# Altium PCB LED主控.pcbdoc (part 1 of 2)
Units mil, origin at the board's own origin, x right, y up, seen from the top; angles counter-clockwise.
Board outline 4187.79 x 2551 mil, 2 copper layers (Top Layer, Bottom Layer); 58 components, 35 nets, 197 pads, 174 vias.
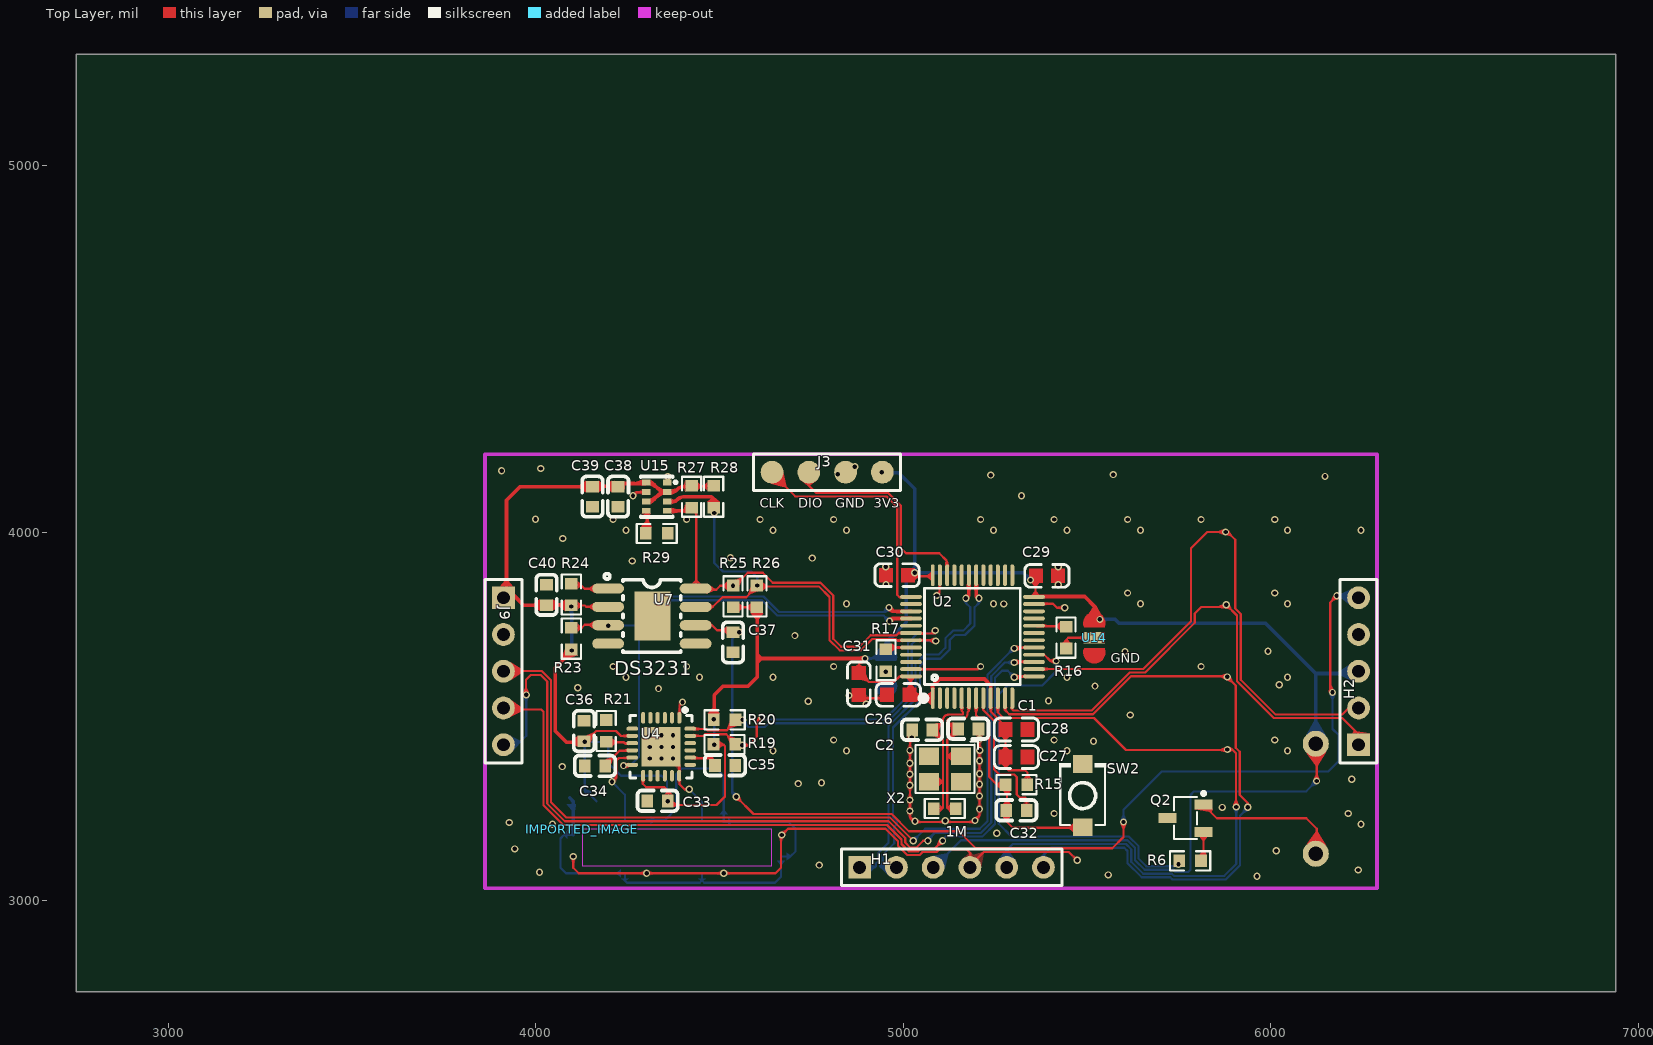
[diagram p0: Top Layer view]
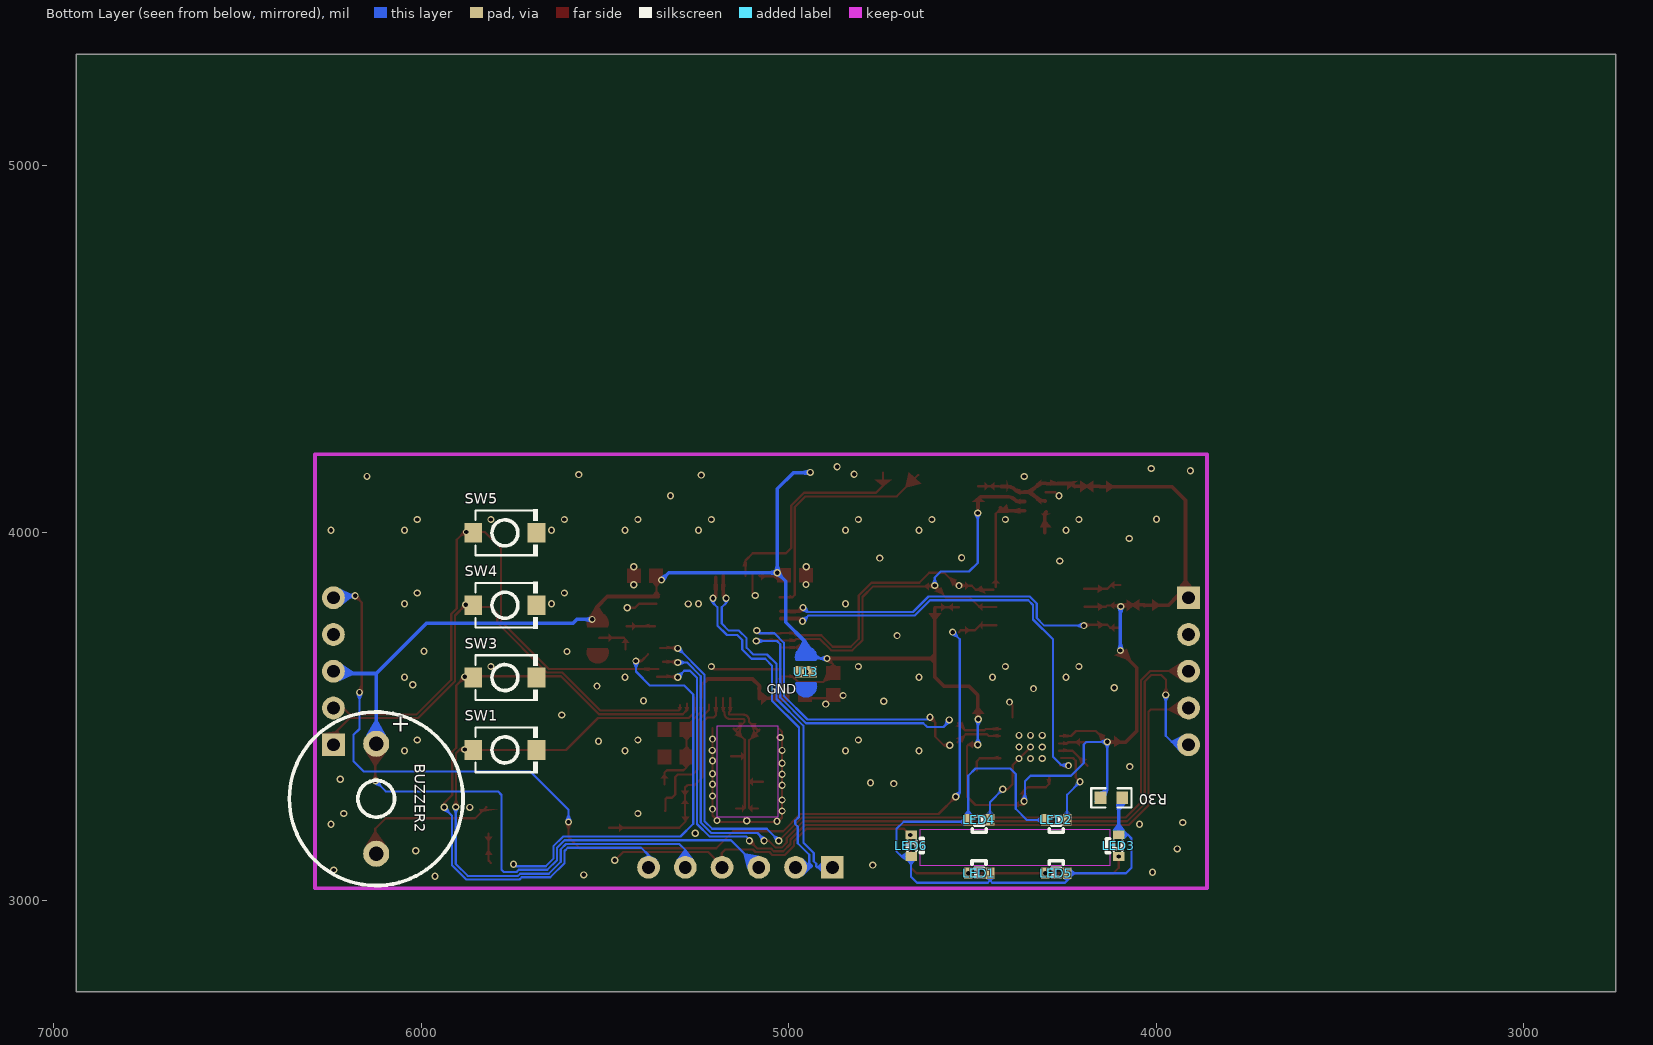
[diagram p1: Bottom Layer view, seen from below]

## Layer stack, top to bottom
Top Layer: signal copper (thickness not stored)
Dielectric: dielectric 12.6, FR-4, Dk 4.8
Bottom Layer: signal copper (thickness not stored)

## Board outline
6937.79,2750 2750,2750 2750,5301 6937.79,5301

## Components (designator, comment, footprint, x,y, rotation, side; value= is the part's Value field where it differs from the comment)
1M "R5" R0603 5112.73,3249.24 r180 top
BUZZER2 "TMB12A05" BUZ-TH_BD12.0-P7.60-D0.6-FD 6122.12,3275.75 r270 bottom
C1 "20pF" C0603 5176.86,3466.23 r0 top
C2 "20pF" C0603 5051.35,3463.36 r0 top
C26 "0.1uF" "C  0603" 4986.25,3558.55 r0 top
C27 "1uF" "C  0603" 5307.73,3389.24 r180 top
C28 "0.1uF" "C  0603" 5307.73,3464.24 r180 top
C29 "0.1uF" "C  0603" 5390.75,3882.26 r0 top
C30 "0.1uF" "C  0603" 4982.73,3884.24 r0 top
C31 "0.1uF" "C  0603" 4878.71,3587.97 r90 top
C32 "100nf" C0603 5307.73,3244.24 r0 top
C33 "10nF" C0603 4331.17,3270.32 r180 top
C34 "100nF" C0603 4161.17,3365.32 r0 top
C35 "2.2nF" C0603 4514.93,3366.91 r0 top
C36 "100nF" C0603 4131.17,3460.32 r90 top
C37 "1u" C0603 4536.67,3701.51 r90 top
C38 "100nF" C0603 4223.89,4097.54 r270 top
C39 "4.7u" C0603 4153.89,4097.54 r270 top
C40 "1u" C0603 4028.95,3830.29 r270 top
H1 "HDR-F-2.54_1x6" HDR-F-2.54_1X6 5081.11,3089.24 r0 top
H2 "HDR-F-2.54_1x5" HDR-F-2.54_1X5 6238.58,3622.72 r90 top
IMPORTED_IMAGE "IMPORTED_IMAGE" IMPORTED_IMAGE 4126.81,3193.27 r0 top
J3 "ST-Link下载口" J-LINK下载口 4827.73,4164.24 r180 top
J9 "HDR-M-2.54_1x5" HDR-M-2.54_1X5 3911.81,3622.72 r270 top
LED1 "XL-1606UGC" LED-SMD_L1.7-W1.1-R-RD_GREEN 4481.81,3073.27 r180 bottom
LED2 "XL-1606UGC" LED-SMD_L1.7-W1.1-R-RD_GREEN 4271.81,3218.27 r0 bottom
LED3 "XL-1606UGC" LED-SMD_L1.7-W1.1-R-RD_GREEN 4101.81,3148.27 r90 bottom
LED4 "XL-1606UGC" LED-SMD_L1.7-W1.1-R-RD_GREEN 4481.81,3218.27 r0 bottom
LED5 "XL-1606UGC" LED-SMD_L1.7-W1.1-R-RD_GREEN 4271.81,3073.27 r180 bottom
LED6 "XL-1606UGC" LED-SMD_L1.7-W1.1-R-RD_GREEN 4666.81,3148.27 r270 bottom
Q2 "2N3906(SOT-23)" SOT-23-3_L2.9-W1.6-P1.90-LS2.8-TR-CW 5767.67,3223.21 r0 top
R6 "1kΩ" R0603 5780.24,3106.86 r0 top
R15 "10k" R0603 5307.73,3314.24 r0 top
R16 "10k" R0603 5442.73,3714.24 r90 top
R17 "10k" R0603 4952.66,3652.57 r90 top
R19 "4.7k" R0603 4513.24,3423.42 r180 top
R20 "4.7k" R0603 4513.74,3490.43 r180 top
R21 "10k" R0603 4191.17,3460.32 r270 top
R23 "4k7" R0603 4096.67,3711.51 r270 top
R24 "4k7" R0603 4096.67,3831.51 r270 top
R25 "4.7k" R0603 4536.67,3826.51 r270 top
R26 "4.7k" R0603 4601.67,3826.51 r270 top
R27 "4.7k" R0603 4483.89,4097.54 r270 top
R28 "4.7k" R0603 4423.89,4097.54 r270 top
R29 "10K" R0603 4328.89,3997.54 r0 top
R30 "Res_0603" R0603 4121.81,3278.27 r0 bottom
SW1 "SKRKAEE020" SW-SMD_L3.9-W3.0-P4.45 5771.92,3408.69 r180 bottom
SW2 "SKRKAEE020" SW-SMD_L3.9-W3.0-P4.45 5487.73,3284.24 r90 top
SW3 "SKRKAEE020" SW-SMD_L3.9-W3.0-P4.45 5771.92,3605.54 r180 bottom
SW4 "SKRKAEE020" SW-SMD_L3.9-W3.0-P4.45 5771.92,3802.39 r180 bottom
SW5 "SKRKAEE020" SW-SMD_L3.9-W3.0-P4.45 5771.92,3999.24 r180 bottom
U2 "STM32F103C8T6" LQFP-48_L7.0-W7.0-P0.50-LS9.0-BL 5188.12,3716.94 r0 top
U4 "MPU-6050" MPU-6050 4341.17,3417.3 r180 top
U7 "DS3231MZ+TRL" DS3231MZ+TRL 4315.73,3772.85 r270 top
U13 "选择焊盘" 选择焊盘 4952.77,3621.59 r90 bottom
U14 "选择焊盘" 选择焊盘 5519.42,3713.87 r90 top
U15 "BMP280" WLGA-8_L2.5-W2.0-P0.65-TR_DPS422 4328.89,4097.54 r0 top
X2 "8MHz" OSC-SMD_4P-L3.2-W2.5-BL 5113.3,3356.77 r180 top

## Footprints (in the part's own frame and the unit in brackets; to place one, negate y for a bottom-side part, rotate by r counter-clockwise, add the part's x,y. Pads: shape width x height; smd on the part's side, far side on the other; paste and mask are expansions set on the pad)
BUZ-TH_BD12.0-P7.60-D0.6-FD [mm]
  round 1.8 hole 1 paste+0 mask+0.051: 1(-3.8,0) 2(3.8,0)
  silkscreen extent -6,-6 6,6
C0603 [mm]
  rect 0.8x0.9 smd paste+0 mask+0.051: 1(-0.7,0) 2(0.7,0)
  silkscreen extent -1.41,-0.71 1.39,0.72
"C  0603" [mil]
  Top Layer region: -48.62,19.29 -12.01,19.29 -12.01,-19.29 -48.62,-19.29
  Top Layer region: 12.01,19.29 48.62,19.29 48.62,-19.29 12.01,-19.29
  silkscreen extent -60,-31 60,31
DS3231MZ+TRL [mm]
  oval 0.7x2.2 smd paste+0 mask+0.05: 1(-1.905,-3.023) 2(-0.635,-3.023) 3(0.635,-3.023) 4(1.905,-3.023) 5(1.905,3.023) 6(0.635,3.023) 7(-0.635,3.023) 8(-1.905,3.023)
  rect 3.4x2.5 smd paste+0 mask+0.05: 9(0,0.051)
  silkscreen extent -2.93,-3.29 2.5,2
HDR-F-2.54_1X5 [mil]
  rect 62x62 hole 35 paste+0 mask+2: 1(-200,0)
  round 62 hole 35 paste+0 mask+2: 2(-100,0) 3(0,0) 4(100,0) 5(200,0)
  silkscreen extent -250,-50 250,50
HDR-F-2.54_1X6 [mil]
  rect 62x62 hole 35 paste+0 mask+2: 1(-200,0)
  round 62 hole 35 paste+0 mask+2: 2(-100,0) 3(0,0) 4(100,0) 5(200,0) 6(300,0)
  silkscreen extent -250,-50 350,50
HDR-M-2.54_1X5 [mil]
  rect 62x62 hole 35 paste+0 mask+2: 1(-200,0)
  round 62 hole 35 paste+0 mask+2: 2(-100,0) 3(0,0) 4(100,0) 5(200,0)
  silkscreen extent -250,-50 250,50
IMPORTED_IMAGE [mil]
J-LINK下载口 [mil]
  round 62 smd paste+0 mask+2: 1(-115,0) 2(-15,0) 3(85,0) 4(185,0)
  silkscreen extent -165,-50 235,50
LED-SMD_L1.7-W1.1-R-RD_GREEN [mm]
  rect 0.6x0.8 smd mask+0.051: 1(0.75,0) 2(-0.75,0)
  silkscreen extent -0.49,-0.25 0.48,0.85
LQFP-48_L7.0-W7.0-P0.50-LS9.0-BL [mm]
  oval 0.27x1.5 smd paste+0 mask+0.05: 1(-2.75,-4.25) 2(-2.25,-4.25) 3(-1.75,-4.25) 4(-1.25,-4.25) 5(-0.75,-4.25) 6(-0.25,-4.25) 7(0.25,-4.25) 8(0.75,-4.25) 9(1.25,-4.25) 10(1.75,-4.25) 11(2.25,-4.25) 12(2.75,-4.25) 25(2.75,4.25) 26(2.25,4.25) 27(1.75,4.25) 28(1.25,4.25) 29(0.75,4.25) 30(0.25,4.25) 31(-0.25,4.25) 32(-0.75,4.25) 33(-1.25,4.25) 34(-1.75,4.25) 35(-2.25,4.25) 36(-2.75,4.25)
  oval 1.5x0.27 smd paste+0 mask+0.05: 13(4.25,-2.75) 14(4.25,-2.25) 15(4.25,-1.75) 16(4.25,-1.25) 17(4.25,-0.75) 18(4.25,-0.25) 19(4.25,0.25) 20(4.25,0.75) 21(4.25,1.25) 22(4.25,1.75) 23(4.25,2.25) 24(4.25,2.75) 37(-4.25,2.75) 38(-4.25,2.25) 39(-4.25,1.75) 40(-4.25,1.25) 41(-4.25,0.75) 42(-4.25,0.25) 43(-4.25,-0.25) 44(-4.25,-0.75) 45(-4.25,-1.25) 46(-4.25,-1.75) 47(-4.25,-2.25) 48(-4.25,-2.75)
  silkscreen extent -3.59,-4.46 3.3,3.34
MPU-6050 [mm]
  oval 0.28x0.8 smd paste-100 mask+0.05: 1(-1.25,-2) 2(-0.75,-2) 3(-0.25,-2) 4(0.25,-2) 5(0.75,-2) 6(1.25,-2) 13(1.25,2) 14(0.75,2) 15(0.25,2) 16(-0.25,2) 17(-0.75,2) 18(-1.242,2)
  oval 0.8x0.28 smd paste-100 mask+0.05: 7(2,-1.25) 8(2,-0.75) 9(2,-0.25) 10(2,0.25) 11(2,0.75) 12(2,1.25) 19(-2,1.25) 20(-2,0.75) 21(-2,0.25) 22(-2,-0.25) 23(-2,-0.75) 24(-2,-1.25)
  rect 2.7x2.7 smd paste-100 mask+0.05: 25(0.012,0)
  silkscreen extent -2.14,-2.79 2.16,2.15
OSC-SMD_4P-L3.2-W2.5-BL [mm]
  rect 1.4x1.2 smd paste+0 mask+0.051: 1(-1.1,-0.875) 2(1.1,-0.875) 3(1.1,0.875) 4(-1.1,0.875)
  silkscreen extent -2.29,-1.9 2.03,1.65
R0603 [mil]
  rect 31.75x34.02 smd paste-3937.01 mask+2: 1(-29.66,0) 2(29.66,0)
  silkscreen extent -55,-26 55,26
SOT-23-3_L2.9-W1.6-P1.90-LS2.8-TR-CW [mm]
  rect 1.25x0.7 smd paste+0 mask+0.051: 1(1.25,0.95) 2(1.25,-0.95) 3(-1.25,0)
  silkscreen extent -0.8,-1.45 1.37,1.82
SW-SMD_L3.9-W3.0-P4.45 [mm]
  rect 1.23x1.36 smd paste+0 mask+0.051: 1(-2.185,0) 2(2.185,0)
  silkscreen extent -2.03,-1.62 2.25,1.62
WLGA-8_L2.5-W2.0-P0.65-TR_DPS422 [mm]
  rect 0.6x0.4 smd paste+0 mask+0.051: 1(0.725,0.975) 2(0.725,0.325) 3(0.725,-0.325) 4(0.725,-0.975) 5(-0.725,-0.975) 6(-0.725,-0.325) 7(-0.725,0.325) 8(-0.725,0.975)
  silkscreen extent -1.1,-1.4 1.4,1.4
选择焊盘 [mm]
  rect 0.8x1.5 smd paste+0 mask+0.051: 2(0,0)
  Top Layer region: -1.035,-0.762 -1.111,-0.756 -1.186,-0.743 -1.259,-0.722 -1.329,-0.695 -1.397,-0.66 -1.461,-0.619 -1.52,-0.571 -1.575,-0.518 -1.623,-0.46 -1.666,-0.397 -1.703,-0.331 -1.732,-0.261 -1.754,-0.188 -1.769,-0.114 -1.777,-0.038 -1.777,0.038 -1.769,0.114 -1.754,0.188 -1.732,0.261 -1.703,0.331 -1.666,0.397 -1.623,0.46 -1.575,0.518 -1.52,0.571 -1.461,0.619 -1.397,0.66 -1.329,0.695 -1.259,0.722 -1.186,0.743 -1.111,0.756 -1.035,0.762 -0.959,0.76 -0.884,0.75 -0.81,0.734 -0.738,0.709 -0.738,-0.709 -0.81,-0.734 -0.884,-0.75 -0.959,-0.76
  Top Layer region: 1.035,0.762 1.111,0.756 1.186,0.743 1.259,0.722 1.329,0.695 1.397,0.66 1.461,0.619 1.52,0.571 1.575,0.518 1.623,0.46 1.666,0.397 1.703,0.331 1.732,0.261 1.754,0.188 1.769,0.114 1.777,0.038 1.777,-0.038 1.769,-0.114 1.754,-0.188 1.732,-0.261 1.703,-0.331 1.666,-0.397 1.623,-0.46 1.575,-0.518 1.52,-0.571 1.461,-0.619 1.397,-0.66 1.329,-0.695 1.259,-0.722 1.186,-0.743 1.111,-0.756 1.035,-0.762 0.959,-0.76 0.884,-0.75 0.81,-0.734 0.738,-0.709 0.738,0.709 0.81,0.734 0.884,0.75 0.959,0.76

## Via types
v1: diameter 19.68, hole 11.81, Top Layer to Bottom Layer, 173 vias
v2: diameter 24.02, hole 12.01, Top Layer to Bottom Layer, 1 vias

## Nets (pads, with @x,y where several pads share a name; then routed paths per layer and width w, separated by ;. In a path a pad name is that pad's centre, name@x,y a point inside that pad or via, vN(x,y) a via of type N, cw(c..) or ccw(c..) an arc to the next point about the centre after c; other vN are vias at no path point)
3V3: BUZZER2.1 C33.1 C36.1 C38.1 C39.1 C40.2 H1.3 H2.3 J3.1 J9.1 R15.2 R19.2 R20.2 R23.2 R24.2 R25.2 R26.2 R27.1 R28.1 R30.2 U2.1 U2.9 U2.24 U2.36 U2.48 U4.8 U4.13 U7.2 U15.2 U15.6 U15.8 | length 8196.4
  Top Layer w6: R24.2@4096.67,3801.85 4132.94,3801.85 4136.75,3798.05 4194.51,3798.05 U7.2@4195.25,3797.31 ; C36.1@4133.93,3429.24 4164.61,3459.92 4218,3459.92 4231.66,3446.27 U4.8@4261.34,3446.27 ; U4.13@4291.13,3336.99 4291.13,3316.28 4300.22,3307.19 4350.13,3307.19 4360.67,3296.64 4360.67,3268.8 C33.1@4358.71,3266.84 ; C33.1@4359.52,3258.75 4491.7,3258.75 4514.88,3281.93 4514.88,3418.99 4510.34,3423.53 4483.93,3423.53 R19.2@4483.6,3423.85 ; R28.1@4426.47,4125.27 4427.39,4126.19 R27.1@4484.06,4126.19 ; R25.2@4536.26,3796.82 R26.2@4602.49,3796.82 ; 4878.98,3621.3 4878.98,3640.92 v1(4895.66,3657.6) ; 4880.86,3618.49 4905.58,3593.77 4974.71,3593.77 4989.59,3608.65 5021.48,3608.65 U2.48@5022.02,3609.2 ; 5006.52,3881.06 5078.09,3881.06 U2.36@5080.11,3883.09 ; 5019.76,3559.56 5019.76,3607.2 U2.48@5020.31,3607.75 ; U2.9@5237.49,3545.15 5237.49,3513.22 5277.53,3473.17 5277.53,3463.53 ; 5277.17,3389.39 5277.53,3389.76 5277.53,3393.44 ; 5277.53,3461.69 5277.53,3393.44 ; R15.2@5338.06,3315.44 5338.06,3346.16 5330.84,3353.38 5285.95,3353.38 5278.82,3360.51 5277.53,3393.44 ; U2.24@5354.73,3825.34 5359.52,3830.13 5359.52,3876.3 ; BUZZER2.1@6123.88,3424.88 6124.7,3424.05 6124.7,3324.71 6124.34,3324.34 v1(6124.34,3324.03)
  Top Layer w10: J9.1@3914.4,3828.7 3940.25,3828.7 3966.43,3802.52 4030.16,3802.52 C40.2@4031.87,3800.81 ; J9.1@3916.93,3838.99 3920.31,3842.37 3920.31,4088.18 3956.92,4124.79 C39.1@4152.94,4124.79 ; C40.2@4033.07,3803.78 4093.07,3802.76 R24.2@4095.65,3800.19 ; v1(4097.27,3679.16) 4097.27,3676.63 4052.85,3632.21 4052.85,3459.82 4082.69,3429.98 C36.1@4133.19,3429.98 ; C39.1@4153.21,4125.52 cw(c4154.22,4124.51) 4154.22,4125.94 C38.1@4216.56,4125.94 ; C38.1@4221.7,4125.1 cw(c4241.74,4105.06) 4241.74,4133.4 4266.77,4133.4 ccw(c4267.03,4133.65) 4267.03,4133.3 U15.8@4297.03,4133.3 ; U15.8@4301.26,4134.39 4302.04,4134.39 cw(c4302.04,4096.37) 4328.93,4123.26 4330.56,4121.62 ccw(c4358.06,4149.12) U15.2@4358.06,4110.23 ; U15.6@4302.43,4086.09 ccw(c4302.43,4121) 4327.12,4096.31 4328.58,4097.76 cw(c4358.17,4068.17) U15.2@4358.17,4110.02 ; U15.2@4354.45,4109.56 4365.64,4109.56 ccw(c4365.64,4136.82) 4384.91,4117.54 cw(c4403.43,4099.03) 4403.43,4125.21 R28.1@4421.68,4125.21 ; R20.2@4485.13,3493.78 4485.13,3557.8 4509.14,3581.8 4577.3,3581.8 4602.41,3606.92 4602.41,3646.23 ; R26.2@4602.41,3794.01 4602.41,3668.28 ; v1(4895.66,3657.6) 4613.1,3657.6 ; v1(4941.03,4163.72) 4941.86,4163.72 J3.1@4942.27,4163.31 ; 5015.34,3554.55 5020.31,3549.58 U2.1@5077.15,3549.58 ; U2.1@5079.55,3547.83 5079.55,3583.32 5097.96,3601.74 5220.65,3601.74 5238.04,3584.35 U2.9@5238.04,3550.68 ; U2.24@5355.37,3825.96 5493.21,3825.96 5521.35,3797.81 5521.35,3761.8 5521.77,3761.38 ; 5516.39,3756 5517.63,3757.24 ; 4602.41,3646.23 4613.1,3656.91 4613.1,3657.6 ; 4602.41,3646.23 4602.41,3658.17 ; 4602.41,3658.17 4602.99,3657.6 4613.1,3657.6 ; 4602.41,3658.17 4602.41,3668.28 ; 4602.41,3668.28 4613.1,3657.6
  Bottom Layer w6: R30.2@4165.15,3268.8 4133.14,3300.81 v1(4133.14,3430.51) 4189.57,3430.51 4196.81,3423.27 4196.81,3373.27 4231.81,3338.27 4341.81,3338.27 4356.81,3323.27 4356.81,3271.23 v1(4359.24,3268.8) ; v1(4483.97,3491.94) 4485.2,3490.72 v1(4485.2,3422.77) ; v1(4895.66,3657.6) 4943.58,3657.6 4952.57,3666.6 ; H1.3@5082.28,3088.07 5156.92,3162.71 5609.62,3162.71 5630.12,3142.22 5630.12,3108.76 5656.53,3082.35 5734.29,3082.35 5740.29,3076.35 5775.24,3076.35 5781.24,3082.35 5781.24,3286.11 5791.03,3295.9 6096.2,3295.9 v1(6124.34,3324.03)
  Bottom Layer w10: v1(4096.04,3799.11) 4097.27,3797.89 v1(4097.27,3679.16) ; v1(4941.03,4163.72) 4941.86,4162.9 4986.98,4162.9 5030.74,4119.13 v1(5030.74,3890.97) ; 4956.83,3674.96 4956.83,3705.13 5007.61,3755.9 5007.61,3867.84 v1(5030.74,3890.97) ; v1(5345.87,3870.94) 5325.84,3890.97 v1(5030.74,3890.97) ; v1(5534.65,3763.83) 5576.42,3763.83 5586.81,3753.43 5985.29,3753.43 6122.12,3616.6 ; BUZZER2.1@6122.12,3425.66 6122.12,3616.6 ; H2.3@6230.62,3626.68 6220.55,3616.6 6122.12,3616.6
$1N131: R29.1 U15.5 | length 58.7
  Top Layer w10: U15.5@4298.97,4056.97 cw(c4288.7,4046.7) 4303.23,4046.7 R29.1@4303.23,3999.45
$1N255: R24.1 U7.1 | length 102.7
  Top Layer w6: R24.1@4097.75,3857.66 4122.21,3857.66 4132.52,3847.35 U7.1@4196.17,3847.35
$1N454: C34.2 U4.10 | length 95.1
  Top Layer w6: C34.2@4186.56,3365.4 4227.77,3406.61 U4.10@4264.56,3406.61
$1N460: C35.1 U4.20 | length 92.9
  Top Layer w6: U4.20@4423.33,3385.82 4479.84,3385.82 4488.27,3377.39 C35.1@4488.27,3352.89
$1N815: BUZZER2.2 Q2.1 | length 388.7
  Top Layer w6: Q2.1@5822.91,3252.82 5852.99,3222.74 6096.38,3222.74 6124.81,3194.32 6124.81,3138.02 BUZZER2.2@6120.39,3133.61
$1N1026: R21.2 U4.9 | length 76.2
  Top Layer w6: R21.2@4188.95,3429.42 4239.54,3429.42 4242.67,3426.29 U4.9@4263.83,3426.29
$1N1067: Q2.2 R6.2 | length 81.8
  Top Layer w6: R6.2@5810.49,3101.32 5816.84,3107.67 Q2.2@5816.84,3180.52
$1N3910: R16.1 U14.2 | length 100.6
  Top Layer w6: R16.1@5443.65,3682.46 5443.65,3708.71 5448.68,3713.73 5514.66,3713.73 U14.2@5515.52,3712.88
$1N3944: R17.1 U13.2
  other v2: 4952.36,3621.07
$1N5126: LED1.1 LED2.1 LED3.1 LED4.1 LED5.1 LED6.1 R30.1 | length 1721.1
  Bottom Layer w6: LED3.1@4101.81,3177.81 4076.81,3177.81 4066.81,3167.81 4066.81,3088.27 4081.81,3073.27 LED5.1@4242.27,3073.27 4242.27,3053.27 4248.27,3047.27 4445.81,3047.27 4451.81,3053.27 4451.81,3072.81 LED1.1@4452.27,3073.27 4452.27,3052.81 4458.1,3046.98 4650.52,3046.98 4666.81,3063.27 LED6.1@4666.81,3118.74 4692.27,3118.74 4706.81,3133.27 4706.81,3193.27 4686.81,3213.27 LED4.1@4511.34,3213.27 ; LED2.1@4301.34,3218.27 4351.81,3218.27 4381.81,3248.27 4381.81,3343.27 4396.81,3358.27 4491.81,3358.27 4511.34,3338.74 LED4.1@4511.34,3218.27
  Bottom Layer w10: R30.1@4092.15,3278.27 4101.81,3268.61 LED3.1@4101.81,3177.81
BAT: C37.2 H2.5 U7.6 | length 2936.8
  Top Layer w6: U7.6@4434.73,3747.85 4479.11,3747.85 4492.73,3734.24 4531.51,3734.24 C37.2@4536.67,3729.07 ; v1(4545.31,3281.33) 4592.23,3234.41 4968.13,3234.41 5015.02,3187.52 5150.52,3187.52 5196.88,3141.16 5568.6,3141.16 5598.95,3171.52 v1(5598.95,3212.63) ; v1(6167.8,3565.2) 6161.7,3571.3 6161.7,3810.02 v1(6179.58,3827.9)
  Bottom Layer w6: v1(4545.31,3281.33) 4546.56,3281.33 4534.14,3293.75 4534.14,3709.64 v1(4553.76,3729.26) ; v1(5598.95,3212.63) 5598.95,3245.68 5703.09,3349.82 6156.24,3349.82 6183.98,3377.55 6183.98,3449.58 6167.8,3465.76 v1(6167.8,3565.2) ; v1(6179.58,3827.9) 6237.31,3827.9 H2.5@6238.59,3829.18
BOOT0: R17.2 U2.44 | length 69.7
  Top Layer w6: R17.2@4954.44,3679.32 4962.54,3687.42 U2.44@5020.8,3687.41
BOOT1: R16.2 U2.20 | length 78.3
  Top Layer w6: U2.20@5363.32,3745.13 5440.22,3745.13 R16.2@5441.2,3744.15
BUZZ: R6.1 U2.16 | length 1161.2
  Top Layer w6: U2.16@5382.26,3668.89 5400.47,3650.67 v1(5415.52,3650.67)
  Bottom Layer w6: v1(5415.52,3650.67) 5415.52,3622.06 5377.1,3583.64 5283.55,3583.64 5259.29,3559.38 5259.29,3207.86 5294.12,3173.04 5613.46,3173.04 5640.14,3146.36 5640.14,3112.91 5660.7,3092.35 5741.48,3092.35 v1@5747.48,3098.35
  other v1: 5748.68,3097.73
DS3231_INT: R23.1 U2.39 U7.3 | length 1011.5
  Top Layer w6: R23.1@4096.67,3741.17 4124.66,3741.17 4132.73,3749.24 4195.34,3749.24 U7.3@4196.73,3747.85
  Top Layer w10: v1(4961.09,3796.25) 4971.76,3785.58 U2.39@5021.43,3785.58
  Bottom Layer w6: v1(4196.65,3746.89) 4304.12,3746.89 4324.92,3767.69 4324.92,3806.96 4344.1,3826.14 4619.36,3826.14 4661.4,3784.1 4948.95,3784.1 v1(4961.09,3796.25)
GND: C1.2 C2.1 C32.2 C33.2 C34.1 C35.2 C36.2 C37.1 C38.2 C39.2 C40.1 H1.4 H2.4 J3.2 J9.2 LED1.2 LED2.2 LED3.2 LED4.2 LED5.2 LED6.2 Q2.3 R21.1 R29.2 SW1.2 SW2.2 SW3.2 SW4.2 SW5.2 U2.8 U2.23 U2.35 U2.47 U4.1 U4.11 U4.18 U4.25 U7.5 U15.1 U15.7 X2.2 X2.4 | length 3657.1
  Top Layer w6: v1(4101.81,3118.75) 4101.81,3088.27 4116.81,3073.27 v1(4301.33,3073.27) v1(4511.33,3073.27) 4651.81,3073.27 4666.81,3088.27 4666.81,3175.12 v1(4668.78,3177.08) 4686.06,3194.36 4951.52,3194.36 4984.99,3160.89 4984.99,3148.43 5010.62,3122.8 5044.43,3122.8 5052.3,3130.67 5089.9,3130.67 5097.16,3137.93 5172.16,3137.93 5181.81,3128.27 H1.4@5181.81,3094.58 ; v1(4207.03,3321.85) 4218.96,3333.78 4218.96,3378.93 4226.5,3386.47 U4.11@4258.39,3386.47 ; v1(4264.47,4100.02) 4274.4,4109.96 4300.71,4109.96 U15.7@4301.45,4109.22 ; U4.25@4340.68,3417.3 4390.07,3367.91 U4.18@4390.07,3338.56 ; U4.18@4390.93,3335.73 4390.93,3315.1 4404.26,3301.78 4417.04,3301.78 v1(4417.22,3301.6) ; U4.1@4391.17,3497.14 4391.17,3530.91 v1(4399.02,3538.76) ; 4881.97,3551.8 4884.71,3549.06 4953.44,3549.06 ; U2.47@5020.66,3628.27 5202.8,3628.27 v1(5210.16,3635.63) ; C2.1@5025.85,3466.13 5017.76,3458.03 v1(5017.76,3407.33) v1(5017.76,3372.33) v1(5017.76,3342.33) v1(5017.76,3312.33) v1(5017.76,3272.33) v1(5017.76,3242.33) 5017.76,3224.57 5030.08,3212.25 5188.94,3212.25 5207.13,3230.43 v1(5207.13,3247.69) v1(5207.13,3283.29) v1(5207.13,3315.16) v1(5207.13,3344.14) v1(5207.13,3378.91) v1(5207.13,3438.1) C1.2@5207.13,3467.85 ; v1(5090.72,3828.81) 5098.37,3836.46 U2.35@5098.37,3891.14 ; H1.4@5174.95,3087.71 H1.4@5181.81,3094.58 ; U2.8@5216.96,3532.16 5216.96,3517.49 5246.5,3487.95 5246.5,3355.89 5260.8,3341.59 5302.02,3341.59 5308.43,3335.17 5308.43,3287.1 5317.13,3278.4 5331.99,3278.4 5335.19,3275.2 5335.19,3244.16 C32.2@5335.94,3243.41 ; U2.23@5359.69,3806.46 5406.97,3806.46 5417.82,3795.6 v1(5439.35,3795.6) ; v1(5472.92,3108.44) 5450.22,3131.15 5218.38,3131.15 H1.4@5181.81,3094.58
  Bottom Layer w6: v1@4208,3325.99 4208,3322.82 v1(4207.03,3321.85) 4242.28,3286.6 LED2.2@4242.28,3218.27 ; v1(4417.22,3301.6) 4452.28,3266.53 LED4.2@4452.28,3218.27
  other v1: 5962.28,3065.25 5557.28,3068.58 4010.05,3075.93 6237.81,3081.89 4770.98,3095.33 6014.36,3134.27 3942.83,3139.31 5254.03,3181.78 4045.29,3206.27 6245.29,3206.27 3927.47,3211.14 5031.66,3214.76 5114.01,3215.94 5194.75,3216.43 5410.16,3235.63 6210.16,3235.63 5867.32,3252.32 4714.1,3317.06 4777.07,3319.31 6220.24,3328.63 4071.81,3363.27 4310.2,3385.27 4341.7,3385.27 4373.19,3385.27 4645.29,3406.27 4845.29,3406.27 5445.29,3406.27 6045.29,3406.27 5207.76,3407.33 4310.2,3416.77 4341.7,3416.77 4373.19,3416.77 5517.26,3432.43 4810.16,3435.63 5410.16,3435.63 6010.16,3435.63 5022.76,3442.33 4310.2,3448.27 4341.7,3448.27 4373.19,3448.27 5617.13,3503.88 4899.05,3533.28 4741.02,3541.04 5394.73,3542.67 4851.76,3556.83 4333.91,3575.47 4113.93,3577.88 5521.48,3582.24 6022.56,3585.68 4245.29,3606.27 4445.29,3606.27 4645.29,3606.27 5445.29,3606.27 6045.29,3606.27 4210.16,3635.63 4410.16,3635.63 4810.16,3635.63 5810.16,3635.63 5603.05,3676.36 5992.11,3677.28 4704.91,3719.65 4845.29,3806.27 5245.29,3806.27 5272.82,3806.05 5645.29,3806.27 6045.29,3806.27 5610.16,3835.63 6010.16,3835.63 5421.32,3857.9 4952.86,3858.59 4952.03,3907.16 5421.14,3906.84 4262,3922.8 4751.77,3930.53 4529.39,3931.83 4073.52,3983.8 4245.29,4006.27 4645.29,4006.27 4845.29,4006.27 5245.29,4006.27 5445.29,4006.27 5645.29,4006.27 6045.29,4006.27 6245.29,4006.27 3999.21,4036.2 4210.16,4035.63 4410.16,4035.63 4610.16,4035.63 4810.16,4035.63 5210.16,4035.63 5410.16,4035.63 5610.16,4035.63 5810.16,4035.63 6010.16,4035.63 5321.55,4099.92 4358.78,4152.58 6147.01,4152.93 5237.43,4156.39 5571.14,4157.73 4821.79,4158.78 3906.78,4168.49 4013.56,4174.25 4868.16,4179.06
KEY1: H1.5 SW1.1 U2.10 | length 1782
  Top Layer w6: U2.10@5256.72,3550.37 5256.72,3510.83 5272.04,3495.51 5518.67,3495.51 5605.62,3408.56 5880.28,3408.56 v1(5881.66,3409.95) 5894.81,3409.95 5905.25,3399.51 5905.25,3253.62 v1(5905.62,3253.25)
  Bottom Layer w6: H1.5@5281.09,3091.29 5281.64,3091.84 5281.64,3137.1 5297.24,3152.7 5605.48,3152.7 5620.11,3138.07 5620.11,3104.61 5652.75,3071.97 5730.51,3071.97 5736.51,3065.97 5873.08,3065.97 5905.62,3098.51 v1(5905.62,3253.25)
KEY2: H1.6 SW3.1 U2.11 | length 1859.9
  Top Layer w6: U2.11@5276.51,3534.57 5276.51,3517.1 5288.08,3505.53 5516.19,3505.53 5619.56,3608.9 5879.53,3608.9 v1(5881.04,3607.39) 5904.5,3583.93 5904.5,3414.42 5915.27,3403.66 5915.27,3286.04 5937.3,3264.01 v1(5937.3,3252.57)
  Bottom Layer w6: H1.6@5381.16,3092.39 5381.16,3122.54 5401.31,3142.68 5601.33,3142.68 5610.09,3133.92 5610.09,3100.46 5648.6,3061.95 5726.36,3061.95 5732.36,3055.95 5877.23,3055.95 5915.63,3094.36 5915.63,3229.15 5936.41,3249.93 5936.41,3251.68 v1(5937.3,3252.57)
KEY3: H2.1 SW4.1 U2.12 | length 1346.1
  Top Layer w6: U2.12@5295.42,3531.1 5295.42,3519.57 5299.44,3515.54 5512.04,3515.54 5615.41,3618.92 5657.21,3618.92 5792.63,3754.35 5792.63,3779.89 5810.34,3797.6 5872.56,3797.6 v1(5878.56,3803.6) 5907.77,3774.39 5907.77,3595.6 6008.1,3495.26 6194.51,3495.26 H2.1@6241.95,3447.82
KEY4: H2.2 SW5.1 U2.14 | length 1587.4
  Top Layer w6: U2.14@5353.92,3628.94 5653.06,3628.94 5782.62,3758.5 5782.62,3957.18 5827.1,4001.67 v1(5876.69,4001.67) 5882.15,4001.67 5902.97,3980.84 5902.97,3793.33 5917.78,3778.51 5917.78,3599.73 6012.13,3505.38 6195.09,3505.38 6219.43,3529.72 H2.2@6240.31,3529.72
MAX7219_CLK: J9.5 U2.15 | length 2428.4
  Top Layer w6: v1@3970.74,3562.36 3972.96,3564.58 3972.96,3599.55 3986.06,3612.65 4013.03,3612.65 4030.82,3594.86 4030.82,3262.58 4079.02,3214.38 4959.83,3214.38 5005.02,3169.19 5005.02,3156.73 5018.92,3142.83 5035.23,3142.83 5054.06,3161.65 v1(5066.72,3161.65) ; v1(5301.94,3646.35) 5304.2,3648.6 U2.15@5341.52,3648.6
  Bottom Layer w6: J9.5@3916.35,3430.88 3957.35,3430.88 3973.77,3447.3 v1(3973.77,3558.43) ; v1(5066.72,3161.65) 5066.72,3164.49 5084.96,3182.73 5210.61,3182.73 5239.26,3211.38 5239.26,3609.49 5276.12,3646.35 v1(5301.94,3646.35)
MAX7219_CS: J9.4 U2.13 | length 2187
  Top Layer w6: J9.4@3933.21,3518.71 4014.8,3518.71 4020.8,3512.71 4020.8,3258.43 4074.87,3204.36 4955.68,3204.36 4995,3165.04 4995,3152.58 5014.77,3132.81 5040.3,3132.81 5048.18,3140.69 5085.75,3140.69 v1(5106.72,3161.65) ; v1(5301.78,3606.29) 5303.44,3607.95 U2.13@5357.34,3607.95
  Bottom Layer w6: v1(5106.72,3161.65) 5106.72,3164.88 5114.55,3172.71 5214.76,3172.71 5249.28,3207.23 5249.28,3605.36 5268.17,3624.26 5283.81,3624.26 v1(5301.78,3606.29)
MAX7219_DIN: J9.3 U2.17 | length 2262.1
  Top Layer w6: J9.3@3924.6,3623.64 4016.18,3623.64 4040.84,3598.99 4040.84,3266.73 4083.17,3224.39 4963.98,3224.39 v1(5026.72,3161.65) ; v1(5301.73,3684.97) 5303.08,3686.32 U2.17@5350.16,3686.32
  Bottom Layer w6: v1(5026.72,3161.65) 5059.4,3194.33 5208.05,3194.33 5229.25,3215.53 5229.25,3613.61 5300.6,3684.97 v1(5301.73,3684.97)
MPU6050_INIT: U2.40 U4.12 | length 1225.7
  Top Layer w6: v1(4238.64,3366.06) 4238.64,3365.82 v1@4240.36,3364.1 ; v1@4240.11,3363.85 v1@4240.36,3364.1 ; U4.12@4260.96,3366.55 4242.81,3366.55 v1@4240.36,3364.1
  Top Layer w10: v1(4962.38,3758.53) 4970.04,3766.2 U2.40@5021.31,3766.2
  Bottom Layer w6: v1@4243.25,3367.9 4243.43,3367.72 4258.5,3367.72 4280.86,3390.08 4280.86,3709.47 4334.93,3763.54 4334.93,3802.84 4348.22,3816.13 4615.21,3816.13 4657.25,3774.09 4946.82,3774.09 v1(4962.38,3758.53)
NRST: C32.1 R15.1 SW2.1 U2.7 | length 604.7
  Top Layer w6: U2.7@5197.51,3550.73 5197.51,3502.73 5203.51,3496.73 5221.4,3496.73 5233.54,3484.59 5233.54,3334.96 5255.09,3313.41 R15.1@5273.12,3313.41 ; R15.1@5276.98,3311.21 5281.77,3306.42 C32.1@5281.77,3244.42 ; C32.1@5281.77,3243.5 C32.1@5281.77,3244.42 ; SW2.1@5488.36,3197.14 5297.4,3197.14 5280.29,3214.25 C32.1@5281.77,3244.42
PD0: 1M.2 C2.2 U2.5 X2.3 | length 435.6
  Top Layer w6: X2.3@5069.99,3322.31 5107.12,3322.31 5107.45,3321.98 ; C2.2@5078.91,3463.36 C2.2@5081.75,3460.52 ; C2.2@5081.16,3460.47 ccw(c5081.16,3463.92) C2.2@5081.75,3460.52 ; 1M.2@5083.07,3249.24 5105.33,3249.24 5107.45,3251.36 5107.45,3321.98 ; U2.5@5158.59,3549.62 5158.59,3515.12 5162.44,3511.27 5162.44,3508.27 cw(c5158.81,3508.27) 5161.37,3505.71 cw(c5158.81,3508.27) 5158.81,3504.65 5123.23,3504.65 ccw(c5123.23,3489.1) 5112.23,3500.1 ccw(c5123.23,3489.1) 5107.68,3489.1 5107.68,3485.56 5083.6,3461.48 cw(c5081.16,3463.92) C2.2@5081.75,3460.52 ; C2.2@5081.75,3460.52 5107.45,3434.82 5107.45,3321.98
PD1: 1M.1 C1.1 U2.6 X2.1 | length 436.1
  Top Layer w6: 5119.46,3391.21 X2.1@5156.61,3391.21 ; 1M.1@5142.39,3249.24 5121.57,3249.24 5119.45,3251.36 5119.45,3436.38 C1.1@5147.34,3464.27 ; C1.1@5149.3,3466.23 C1.1@5147.34,3464.27 ; U2.6@5178.28,3549.61 5178.28,3515.12 5174.44,3511.27 5174.44,3508.27 cw(c5158.81,3508.27) 5169.86,3497.22 cw(c5158.81,3508.27) 5158.81,3492.65 5123.23,3492.65 ccw(c5123.23,3489.1) 5120.72,3491.61 ccw(c5123.23,3489.1) 5119.68,3489.1 5119.68,3485.56 5135.68,3469.56 ccw(c5148.54,3482.41) C1.1@5147.34,3464.27
RX: H1.1 U2.31 | length 990.4
  Top Layer w10: v1(5170.05,3821.6) 5178.16,3829.72 U2.31@5178.16,3884.11
  Bottom Layer w6: H1.1@4881.11,3089.24 4922.99,3089.24 4925.11,3091.36 4925.11,3099.33 4931.64,3105.86 4931.64,3128.26 4959.92,3156.53 4959.92,3474.36 5033.01,3547.46 5033.01,3642.76 5058.74,3668.48 5096.14,3668.48 5114.28,3686.62 5114.28,3712.6 5134.92,3733.24 5162.73,3733.24 5181.87,3752.37 5181.87,3796.85 5170.05,3808.67 v1(5170.05,3821.6)